# EAGLE board PyrologgerV2 (EAGLE 6.1)
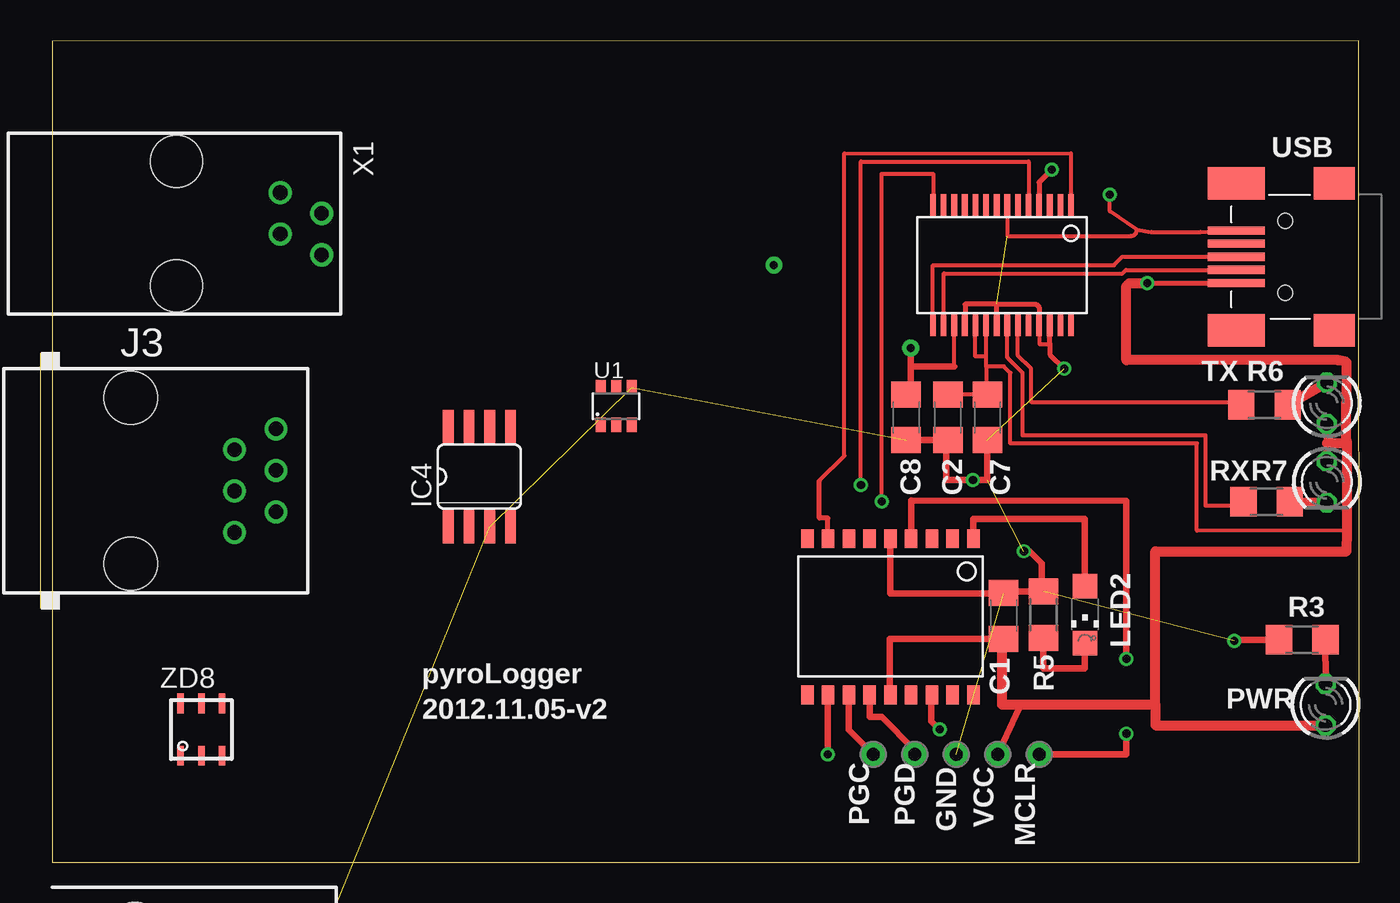
[diagram p0: board, top side]
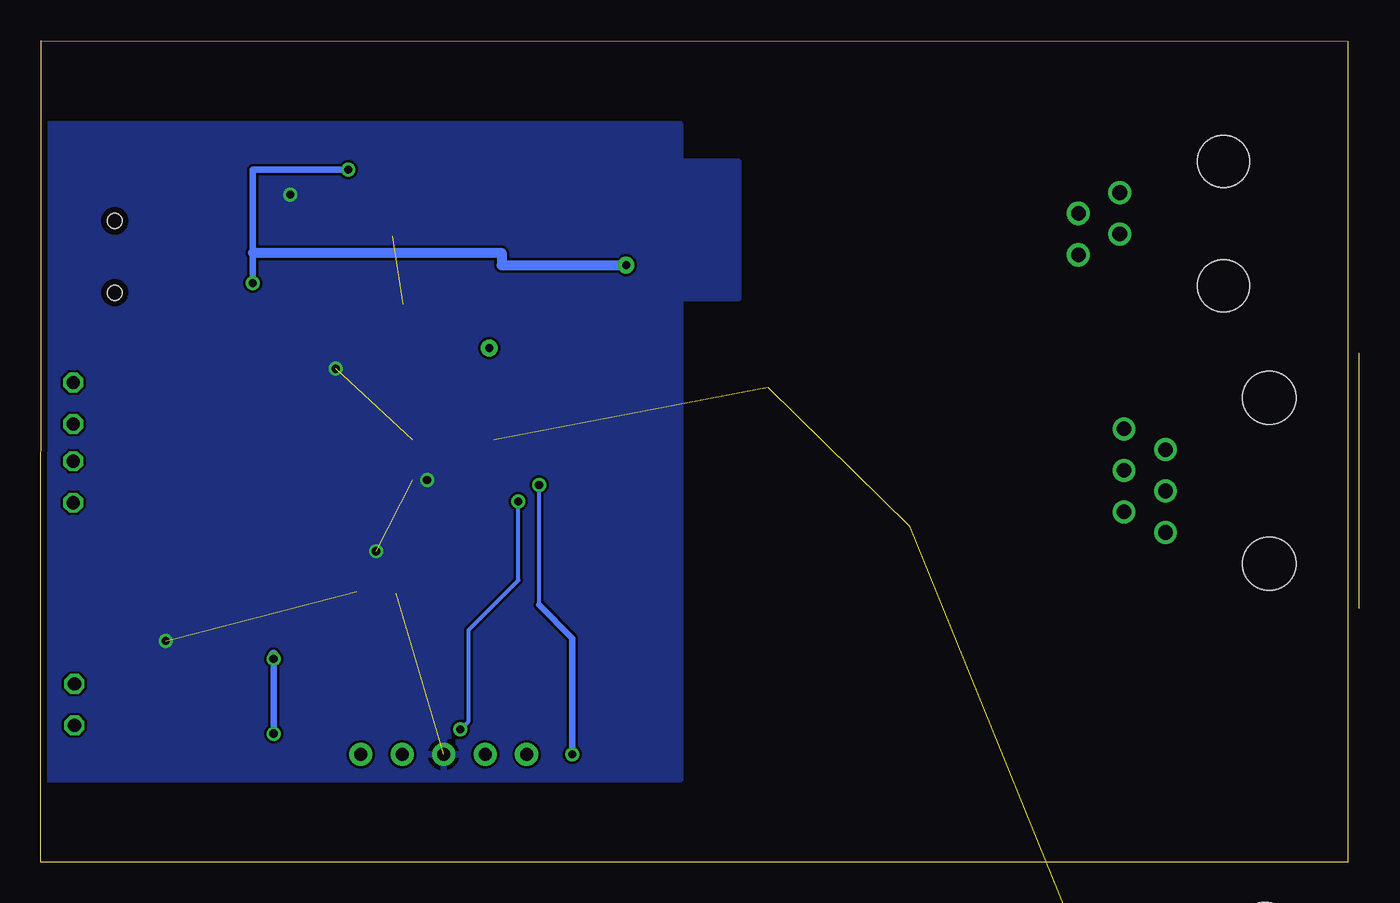
[diagram p1: board, bottom side, seen from below]

Size 80.03 x 50.32 mm. Coordinates in mm from the lower left corner, seen from the top.
Outline: 0,0 80.03,0 80.01,50.32 0,50.29 0,0
Copper layers (1*16): Top 0.0356mm / dielectric 1.5011mm / Bottom 0.0356mm
Design rules: minimum track width 6mil, minimum drill 13mil, track to track 6mil, track to pad 6mil, pad to pad 6mil, via to via 6mil, smd to smd 6mil, copper to edge 15mil, drill to drill 6mil, minimum pad ring 7mil, minimum via ring 7mil, stop-mask expansion 4mil, vias tented up to drill 0mil, thermal gap 10mil

## Footprints (pad centres in the part's own frame; a part is rotated, then mirrored left to right if it is on the bottom)
C1206@1 = smd 1.6 x 1.8: 1 -1.4,0; 2 1.4,0
SO-18W = smd 0.762 x 1.143: 1 -5.08,-4.788; 2 -3.81,-4.788; 3 -2.54,-4.788; 4 -1.27,-4.788; 5 0,-4.788; 6 1.27,-4.788; 7 2.54,-4.788; 8 3.81,-4.788; 9 5.08,-4.788; 10 5.08,4.788; 11 3.81,4.788; 12 2.54,4.788; 13 1.27,4.788; 14 0,4.788; 15 -1.27,4.788; 16 -2.54,4.788; 17 -3.81,4.788; 18 -5.08,4.788
SSOP28DB = smd 0.348 x 1.397: 1 -4.225,-3.656; 2 -3.575,-3.656; 3 -2.925,-3.656; 4 -2.275,-3.656; 5 -1.625,-3.656; 6 -0.975,-3.656; 7 -0.325,-3.656; 8 0.325,-3.656; 9 0.975,-3.656; 10 1.625,-3.656; 11 2.275,-3.656; 12 2.925,-3.656; 13 3.575,-3.656; 14 4.225,-3.656; 15 4.225,3.656; 16 3.575,3.656; 17 2.925,3.656; 18 2.275,3.656; 19 1.625,3.656; 20 0.975,3.656; 21 0.325,3.656; 22 -0.325,3.656; 23 -0.975,3.656; 24 -1.625,3.656; 25 -2.275,3.656; 26 -2.925,3.656; 27 -3.575,3.656; 28 -4.225,3.656
SO08 = smd 0.66 x 2.032: 1 -1.905,-3.073; 2 -0.635,-3.073; 3 0.635,-3.073; 4 1.905,-3.073; 5 1.905,3.073; 6 0.635,3.073; 7 -0.635,3.073; 8 -1.905,3.073
CONN-RJ11 = drill 0.889 square: 1 1.27,3.175 | drill 0.889: 2 -1.27,1.905; 3 1.27,0.635; 4 -1.27,-0.635; 5 1.27,-1.905; 6 -1.27,-3.175 | hole 3.175: -7.62,5.08; -7.62,-5.08
RJ11-NO_SHIELD = drill 0.9 pad 1.4: 1 -3.175,8.89; 2 -1.905,6.35; 3 -0.635,8.89; 4 0.635,6.35; 5 1.905,8.89; 6 3.175,6.35 | hole 3.251: -5.08,0; 5.08,0
LED3MM = drill 0.813 octagon: A -1.27,0; K 1.27,0
CHIPLED_1206 = smd 1.5 x 1.5: A 0,-1.75; C 0,1.75
R1206 = smd 1.6 x 1.803: 1 -1.422,0; 2 1.422,0
P1-13@1 = drill 0.8 pad 1.422: TP 0,0
TSOT23 = smd 0.6 x 0.9: 1 -0.95,-1.15; 2 0,-1.15; 3 0.95,-1.15; 4 0.95,1.15; 5 0,1.15; 6 -0.95,1.15
14867 = drill 0.9 pad 1.422: 1 -1.905,6.35; 2 -0.635,8.89; 3 0.635,6.35; 4 1.905,8.89 | hole 3.2: -3.81,0; 3.81,0
USB-MINIB = smd 2.5 x 2: 1 -3,-4.5; 2 -3,4.5 | smd 3.5 x 2: 3 3,-4.5; 4 3,4.5 | smd 3.5 x 0.5: D+ 3,0; D- 3,0.8; GND 3,-1.6; ID 3,-0.8; VBUS 3.01,1.61 | hole 0.9: 0,2.2; 0,-2.2
TSOC6 = smd 0.406 x 1.219: 1 -1.27,-1.6; 2 0,-1.6; 3 1.27,-1.6; 4 1.27,1.6; 5 0,1.6; 6 -1.27,1.6

## Placement (x,y rotation side)
C1  .1uF  [C1206@1]  58.27,15.09 90 top
C2  4.7uF  [C1206@1]  54.85,27.25 270 top
C7  .01uF  [C1206@1]  57.28,27.25 270 top
C8  .1uF  [C1206@1]  52.3,27.25 270 top
IC1  16F88  [SO-18W]  51.33,15.04 180 top
IC2  FT232RL  [SSOP28DB]  58.17,36.58 180 top
IC4  DS2482-100S  [SO08]  26.16,23.62 0 top
J1  [CONN-RJ11]  12.7,-9.14 0 top  (outside the outline)
J3  RJ11-2L-B  [RJ11-NO_SHIELD]  4.83,23.37 270 top
LED1  [LED3MM]  77.98,9.65 90 top
LED2  [CHIPLED_1206]  63.25,15.16 180 top
LED3  [LED3MM]  78.05,28.12 90 top
LED4  [LED3MM]  78.05,23.29 270 top
R3  330  [R1206]  76.55,13.62 0 top
R5  330  [R1206]  60.71,15.16 90 top
R6  330  [R1206]  74.24,28.02 0 top
R7  330  [R1206]  74.37,22.07 0 top
TP1  PTR1PAD1-13  [P1-13@1]  52.83,6.6 0 top
TP2  PTR1PAD1-13  [P1-13@1]  50.29,6.6 0 top
TP5  PTR1PAD1-13  [P1-13@1]  55.37,6.6 0 top
TP6  PTR1PAD1-13  [P1-13@1]  57.91,6.6 0 top
TP7  PTR1PAD1-13  [P1-13@1]  60.45,6.6 0 top
U1  DS2483  [TSOT23]  34.54,27.94 0 top
X1  14867  [14867]  7.62,39.12 270 top
X4  USBMINIB  [USB-MINIB]  75.51,37.08 180 top
ZD8  DS9503P  [TSOC6]  9.14,8.13 0 top

## Library data of the parts
C1 C2 C7 C8 R3 R5-R7 = rcl
IC1 = nervus
IC2 X4 = SparkFunEagle-6-6-07
IC4 ZD8 = 1wire
J1 = QuantumOptics
J3 = con-tycoelectronics; MF: TYCO ELECTRONICS; MPN: RJ11-2L-B; OC_FARNELL: unknown; OC_NEWARK: 83F4463
LED1-LED4 = led
TP1 TP2 TP5-TP7 = testpad
U1 = ds2483
X1 = con-4ucon; OC_FARNELL: unknown; OC_NEWARK: unknown

## Nets
3.3V: C8.1 IC2.17
+5V: C1.1 C2.1 C7.1 IC1.14 IC2.4 IC2.19 IC2.20 LED1.A LED3.A LED4.A TP6.TP X4.VBUS
GND: C1.2 C2.2 C7.2 C8.2 IC1.5 IC2.7 IC2.18 IC2.21 IC2.25 IC2.26 IC4.3 J1.5 R3.1 R5.2 TP5.TP U1.4 X4.GND
MCLR: IC1.4 TP7.TP
N$1: IC2.15 X4.D+
N$2: IC2.16 X4.D-
N$4: LED3.K R6.2
N$5: LED4.K R7.2
N$6: IC2.23 R6.1
N$7: IC2.22 R7.1
N$8: LED1.K R3.2
N$9: IC1.1 LED2.A
N$18: LED2.C R5.1
OSC: IC1.16 IC2.14
OW: J1.3
PGC: IC1.13 TP1.TP
PGD: IC1.12 TP2.TP
RDY: IC1.6
RX: IC1.8 IC2.1
SCL: IC1.10
SDA: IC1.7
TX: IC1.11 IC2.5
VCC: U1.6
VDD: IC4.1

## Tracks (layer width: path | path; a pad name or v marks a point on that pad's centre or on a via)
3.3V  (via drill 0.5 pad 1.02)
  Top 0.254: 55.24,30.36 IC2.17
  Top 0.406: C8.1 52.58,28.65 52.58,29.97 52.58,30.36 | 52.58,30.36 55.24,30.36 | 52.58,30.36 v52.58,31.5
+5V  (via drill 0.5 pad 0.41, 0.5 pad 1.02)
  Top 0.254: IC2.4 60.45,40.74 | IC2.19 56.54,30.99 57.19,30.99 | 57.19,30.99 IC2.20 | C2.1 C7.1 57.19,28.65 57.19,30.37 | 57.19,30.37 57.19,30.99 | 57.19,30.37 58.28,30.37 58.67,29.97 58.67,25.65 70.1,25.65 70.1,20.32 79.3,20.3
  Top 0.305: v67.06,35.47 X4.VBUS | IC2.4 60.44,41.65 v61.21,42.42
  Top 0.406: IC1.14 51.31,10.25 51.31,13.66 58.17,13.66 58.27,13.66 C1.1 | LED4.A 78.05,25.65 LED3.A | TP6.TP 59.18,9.4 58.93,9.65
  Top 0.61: 58.17,13.66 58.17,9.65 58.93,9.65 67.56,9.65 | 67.56,9.65 67.56,19.05 79.27,19.05 79.3,20.3 79.3,25.73 79.25,25.65 | LED1.A 67.56,8.38 67.56,9.65 | 79.25,25.65 78.05,25.65 | v67.06,35.47 65.95,35.47 65.79,35.31 65.79,30.76 78.74,30.76 79.27,30.63 79.25,25.86 79.25,25.65
  Bottom 0.406: v61.21,42.42 67.06,42.42 67.06,37.34 v67.06,35.47
  Bottom 0.61: v44.2,36.58 51.82,36.58 51.82,37.34 67.06,37.34
GND  (via drill 0.5 pad 0.41)  (8 unrouted)
  Top 0.254: 61.09,32.26 IC2.26 | IC2.25 60.45,31.75 61.09,31.75 | X4.GND 70.33,38.61 67.31,38.61 66.42,38.73 | 66.42,38.73 64.77,39.88 v64.77,40.89 | IC2.7 58.5,40.3 58.5,38.35 66.04,38.35 arc90 66.42,38.73 | C2.2 55.26,25.78
  Top 0.305: v61.98,30.23 61.09,31.11 61.09,31.75 61.09,32.26 | IC2.25 60.44,34 60.25,34.19 57.84,34.19 | IC2.21 57.84,34.19 | IC2.18 55.91,32.92 55.91,34.19 57.84,34.19
  Top 0.406: C7.2 57.28,23.42 v56.39,23.42 54.75,23.42 54.75,25.85 C2.2 C8.2 | R3.1 72.44,13.62 v72.39,13.56 | v59.51,19.05 59.87,19.05 60.6,18.31 60.6,16.69 R5.2 58.37,16.59 C1.2 58.27,16.46 51.33,16.46 IC1.5
  pour Bottom: 80.01,45.21 40.89,45.21 40.89,42.93 37.34,42.93 37.34,34.54 40.89,34.54 40.89,5.08 80.01,5.08
MCLR  (via drill 0.5 pad 0.41)
  Top 0.406: 52.6,19.85 52.6,22.15 65.79,22.12 v65.79,12.45 | v65.79,7.87 65.79,6.6 TP7.TP
  Top 0.61: 52.6,19.85 IC1.4
  Bottom 0.406: v65.79,7.87 v65.79,12.45
  Bottom 0.61: v65.79,12.45 65.79,12.7
N$1
  Top 0.254: X4.D+ 65.53,37.08 65.02,36.58 53.94,36.58 IC2.15
N$2
  Top 0.254: X4.D- 65.75,36.28 65.53,36.07 54.61,36.07 54.59,36.05 IC2.16
N$4
  Top 0.61: R6.2 LED3.K
N$5
  Top 0.61: LED4.K 78.05,21.77 77.8,22.02 R7.2
N$6
  Top 0.254: IC2.23 59.14,31.03 59.94,30.23 59.94,28.19 72.64,28.19 R6.1
N$7
  Top 0.254: IC2.22 58.49,30.92 59.44,29.97 59.44,26.16 70.61,26.16 70.61,21.84 72.95,21.84 R7.1
N$8
  Top 0.406: R3.2 77.98,11.03 LED1.K
N$9
  Top 0.406: LED2.A 63.25,21.03 56.41,21.03 IC1.1
N$18
  Top 0.406: LED2.C 63.25,11.86 60.71,11.86 R5.1
OSC  (via drill 0.5 pad 0.41)
  Top 0.254: IC2.14 53.95,42.16 50.8,42.16 v50.8,22.1 | 53.85,10.22 IC1.16
  Top 0.406: v54.36,8.13 53.85,8.64 53.85,10.22
  Bottom 0.254: v50.8,22.1 50.8,17.27 53.85,14.22 53.85,8.64 v54.36,8.13
PGC
  Top 0.406: IC1.13 50.06,8.89 50.8,8.89 52.83,6.86 TP1.TP
PGD
  Top 0.406: IC1.12 48.79,8.1 TP2.TP
RX
  Top 0.254: IC2.1 62.38,40.11 62.38,43.41 48.51,43.43 48.51,24.89 46.99,23.37
  Top 0.305: 46.99,23.37 46.99,21.08 47.5,21.08 47.5,19.82 IC1.8
TX  (via drill 0.5 pad 0.41)
  Top 0.254: IC2.5 59.79,42.93 49.53,42.93 v49.53,23.11 | 47.5,10.22 IC1.11
  Top 0.406: v47.5,6.6 47.5,10.22
  Bottom 0.254: 49.53,15.75 v49.53,23.11
  Bottom 0.406: 49.53,15.75 47.5,13.72 v47.5,6.6

## Text on the board
tNames: USB | TX | RX | pyroLogger | 2012.11.05-v2 | PWR | PGC | PGD | GND | VCC | MCLR